# Altium PCB PCB2.PcbDoc
Units mm, origin at the board's own origin, x right, y up, seen from the top; angles counter-clockwise.
Board outline 70 x 75 mm, 2 copper layers (Top Layer, Bottom Layer); 7 components, 32 nets, 105 pads, 0 vias.
Unrouted connection lines stored in the file: 2.
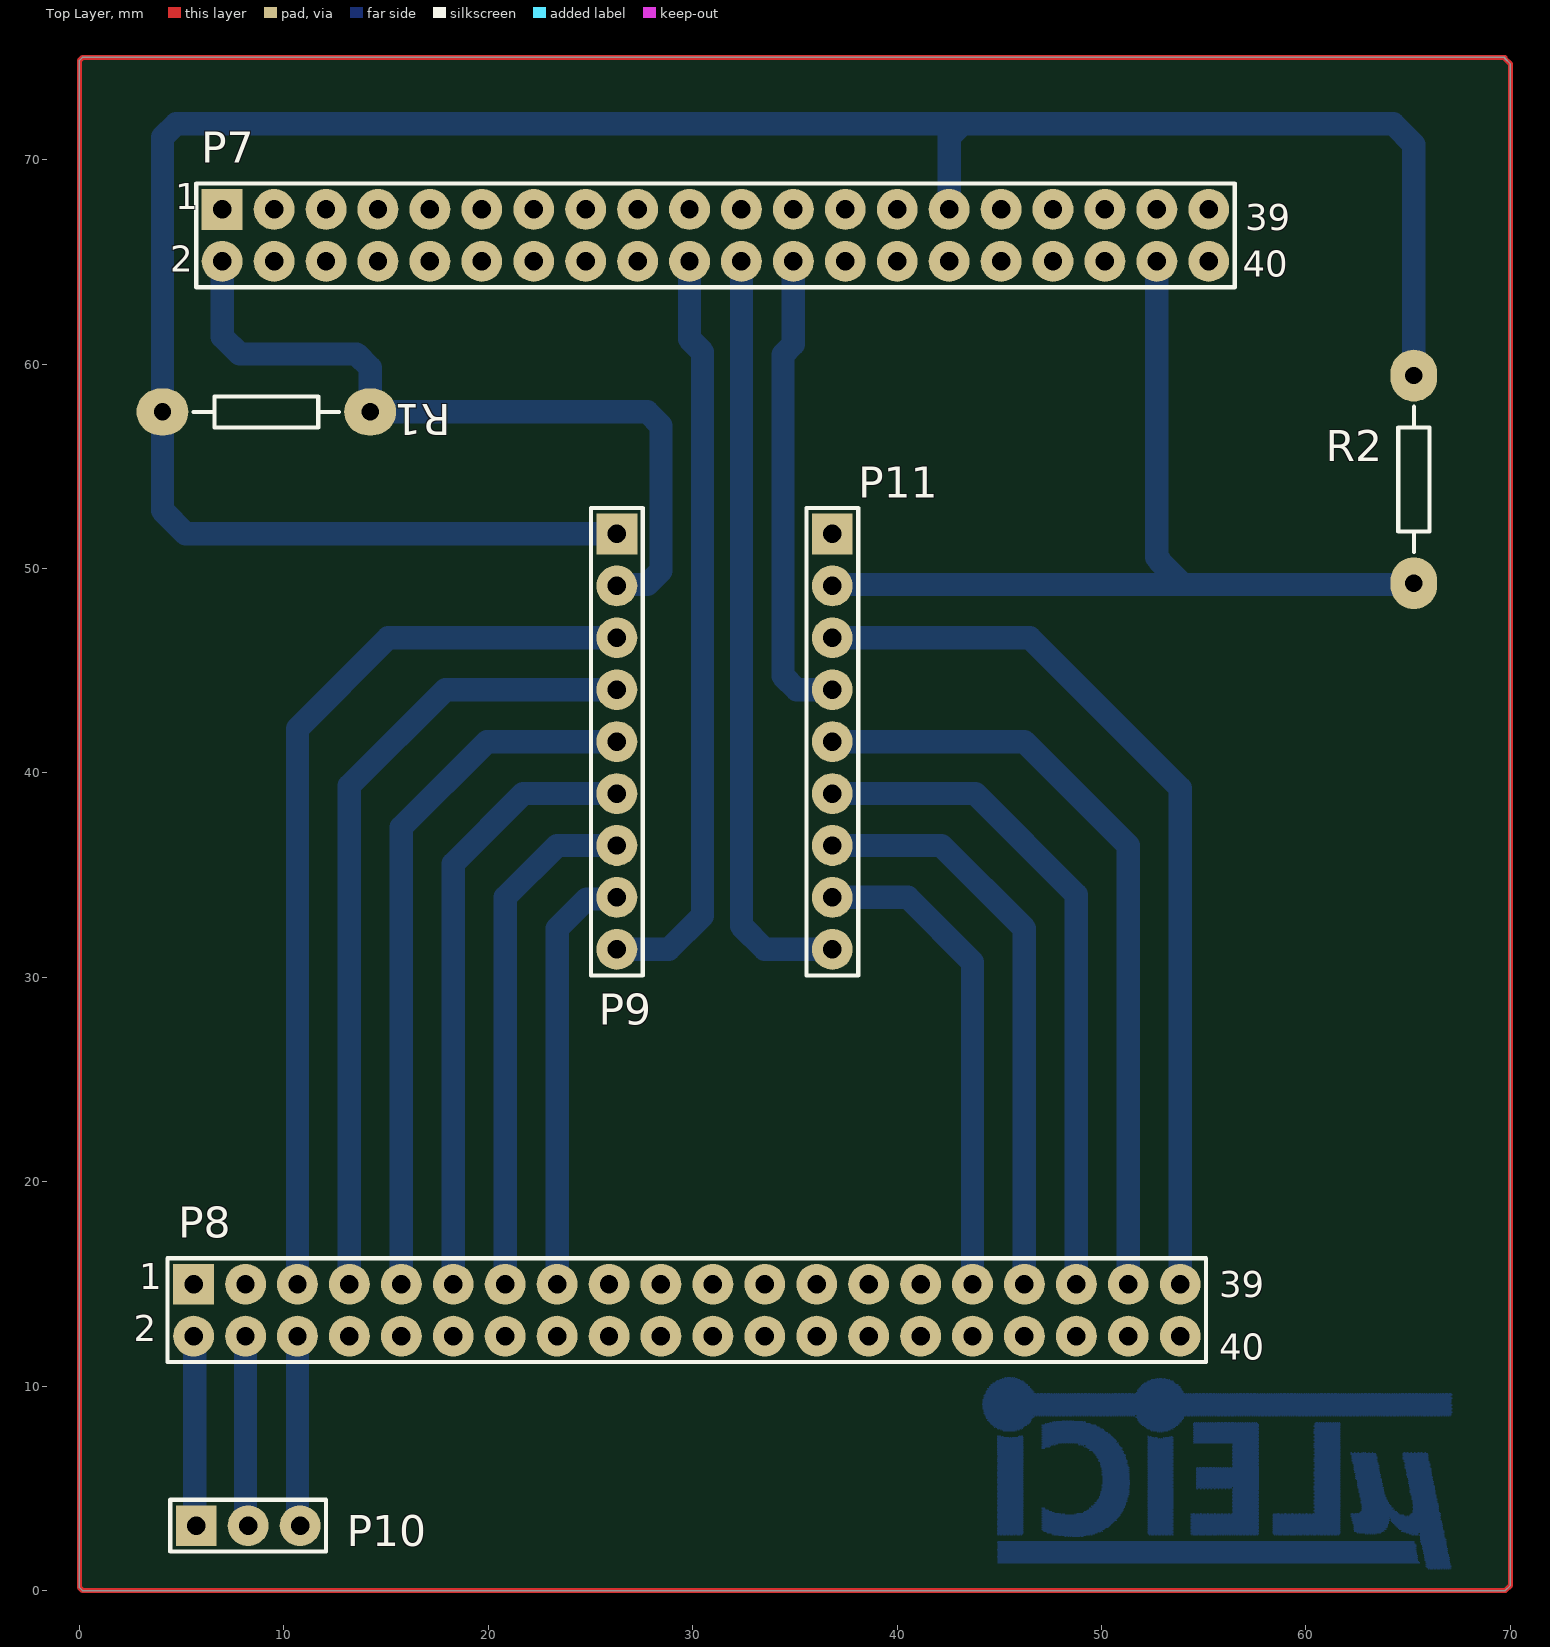
[diagram p0: Top Layer view]
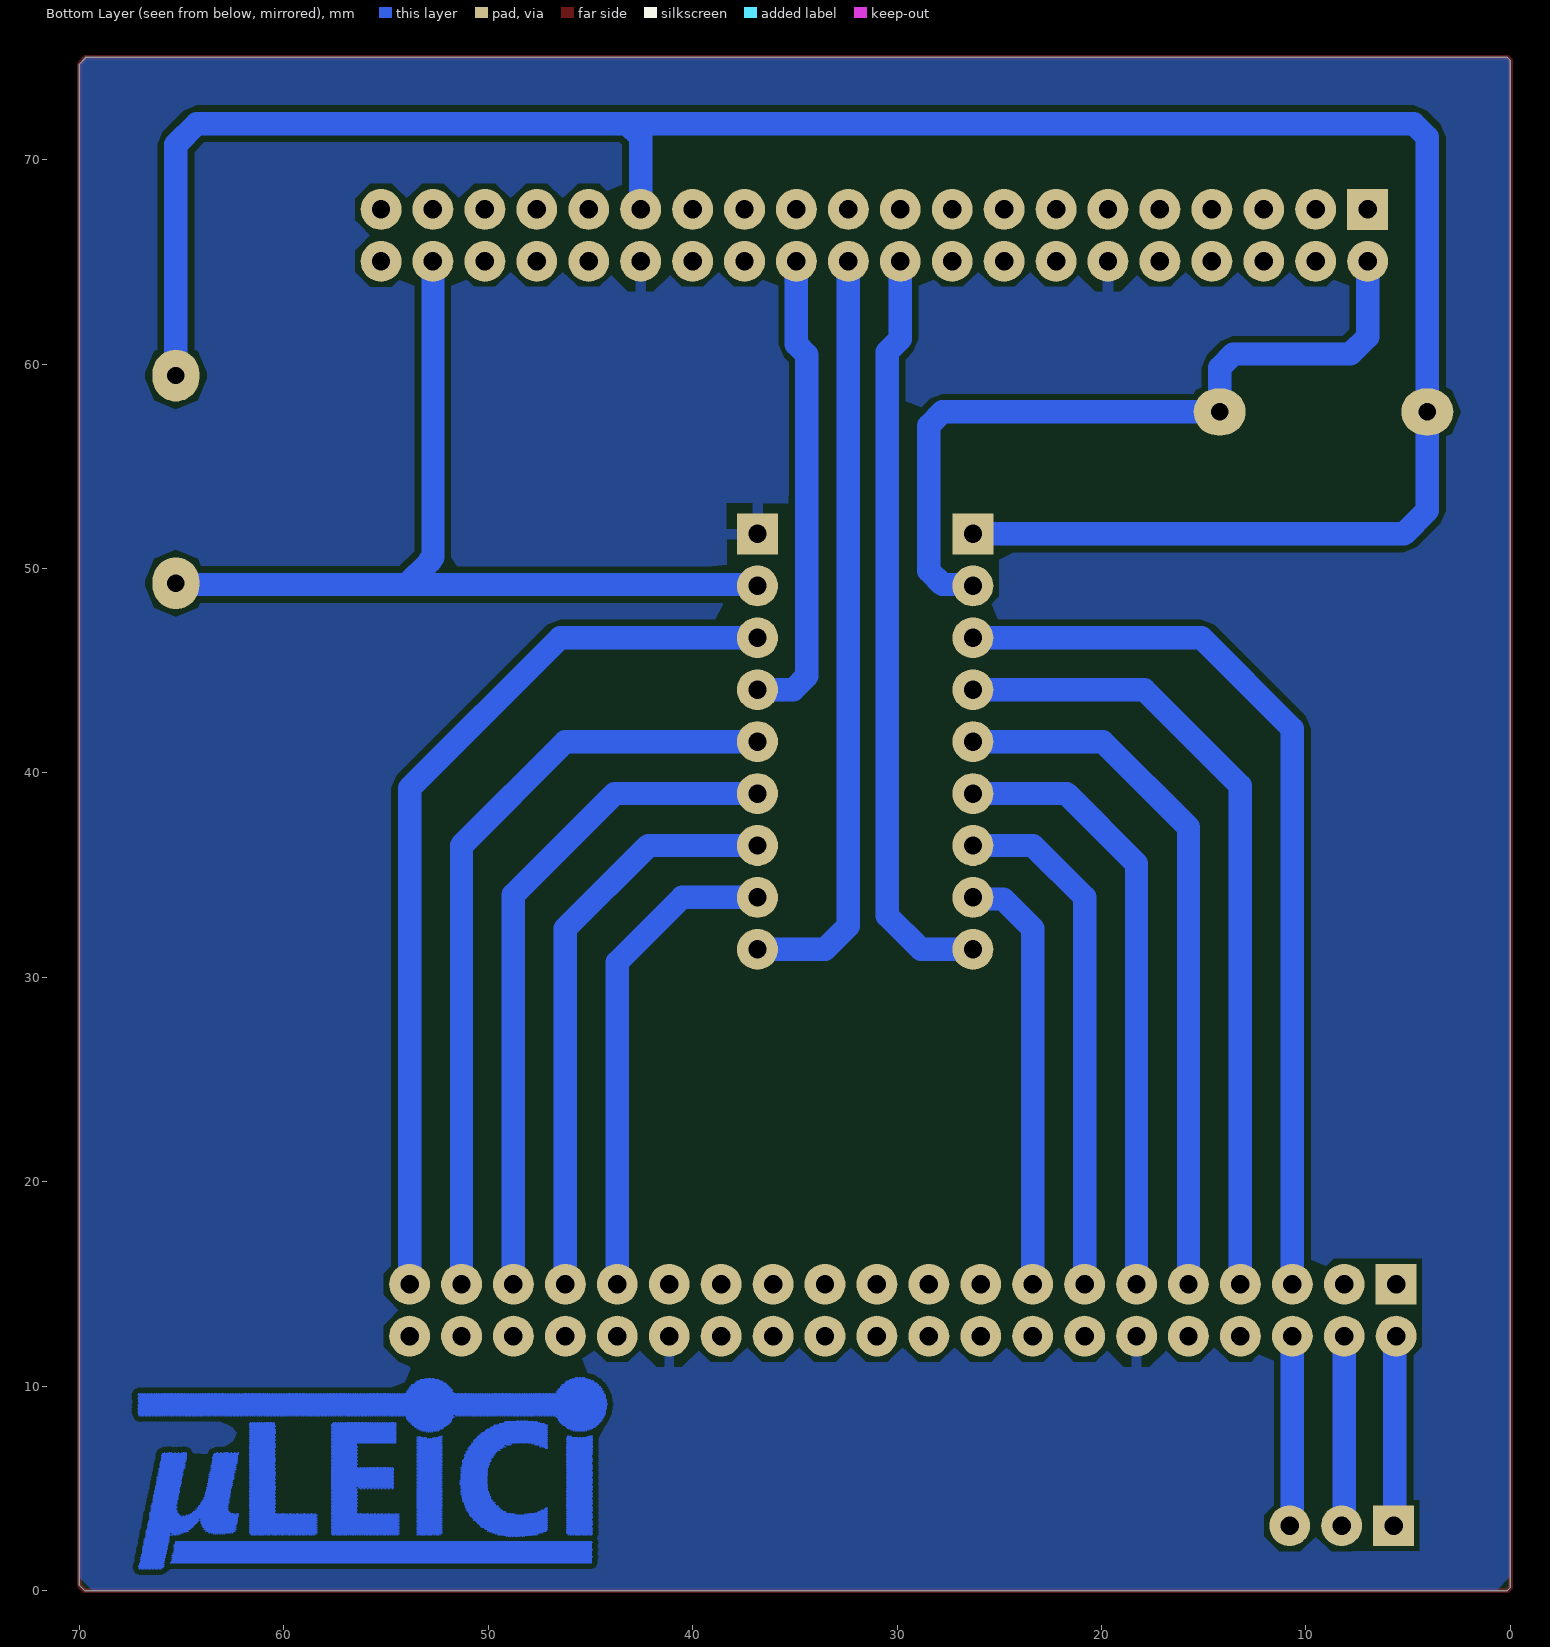
[diagram p1: Bottom Layer view, seen from below]

## Layer stack, top to bottom
Top Solder: solder mask 0.0102, Solder Resist, Dk 3.5
Top Layer: signal copper 0.0356
Dielectric 1: dielectric 0.32, FR-4, Dk 4.8
Bottom Layer: signal copper 0.0356
Bottom Solder: solder mask 0.0102, Solder Resist, Dk 3.5

## Board outline
0.149,0 0,0.149 0,74.851 0.149,75 69.723,75 69.723,74.953 70,74.676 70,0.254 69.746,0

## Design rules (kind name [scope] priority, off if disabled: settings)
Clearance [All] p1: gap=0.254 ignorepadtopadclearanceinfootprint=FALSE
PlaneClearance [All] p1: clearance=1
PlaneConnect [All] p1: planeconnectstyle=Relief reliefexpansion=0.508 reliefentries=4 reliefconductorwidth=1 reliefairgap=1
PolygonConnect [All] p1: connectstyle=Relief reliefconductorwidth=0.5 reliefentries=4 polygonreliefangle="90 Angle" airgapwidth=0.5
RoutingVias [All] p1: holewidth=0.711 width=1.27 viastyle="Through Hole" minholewidth=0.711 minwidth=1.27 maxholewidth=0.711 maxwidth=1.27
SolderMaskExpansion [All] p1: expansion=0.102 istentingtop=FALSE
Width [All] p1: maxlimit=1.27 minlimit=0.762 preferedwidth=1.143
28 further rules are at their usual default settings.

## Components (designator, comment, footprint, x,y, rotation, side; value= is the part's Value field where it differs from the comment)
P7 "GPIO0" HDR2X20 6.985,67.564 r0 top
P8 "GPIO1" HDR2X20 5.588,14.986 r0 top
P9 "Header 9" HDR1X9 26.289,51.689 r270 top
P10 "Header 3" HDR1X3 5.715,3.175 r0 top
P11 "Header 9" HDR1X9 36.83,51.689 r270 top
R1 "Resistor" "RES 0.25 W - 0.4 In" 9.144,57.658 r180 top value=10k
R2 "Resistor" "RES 0.25 W - 0.4 In" 65.278,54.356 r90 top value=10k

## Footprints (in the part's own frame and the unit in brackets; to place one, negate y for a bottom-side part, rotate by r counter-clockwise, add the part's x,y. Pads: shape width x height; smd on the part's side, far side on the other; paste and mask are expansions set on the pad)
HDR1X3 [mm] "Connector; Header; 3 Position"
  rect 2x2 hole 0.9: 1(0,0)
  round 2 hole 0.9: 2(2.54,0) 3(5.08,0)
  silkscreen extent -1.27,-1.27 6.35,1.27
HDR1X9 [mm] "Connector; Header; 9 Position"
  rect 2x2 hole 0.9: 1(0,0)
  round 2 hole 0.9: 2(2.54,0) 3(5.08,0) 4(7.62,0) 5(10.16,0) 6(12.7,0) 7(15.24,0) 8(17.78,0) 9(20.32,0)
  silkscreen extent -1.27,-1.27 21.59,1.27
HDR2X20 [mm] "Connector; Header; 20x2 Position"
  rect 2x2 hole 0.9: 1(0,0)
  round 2 hole 0.9: 2(0,-2.54) 3(2.54,0) 4(2.54,-2.54) 5(5.08,0) 6(5.08,-2.54) 7(7.62,0) 8(7.62,-2.54) 9(10.16,0) 10(10.16,-2.54) 11(12.7,0) 12(12.7,-2.54) 13(15.24,0) 14(15.24,-2.54) 15(17.78,0) 16(17.78,-2.54) 17(20.32,0) 18(20.32,-2.54) 19(22.86,0) 20(22.86,-2.54) 21(25.4,0) 22(25.4,-2.54) 23(27.94,0) 24(27.94,-2.54) 25(30.48,0) 26(30.48,-2.54) 27(33.02,0) 28(33.02,-2.54) 29(35.56,0) 30(35.56,-2.54) 31(38.1,0) 32(38.1,-2.54) 33(40.64,0) 34(40.64,-2.54) 35(43.18,0) 36(43.18,-2.54) 37(45.72,0) 38(45.72,-2.54) 39(48.26,0) 40(48.26,-2.54)
  silkscreen extent -1.27,-3.81 49.53,1.27
"RES 0.25 W - 0.4 In" [mm] "RESISTOR, 0.25 W, 0.4 IN LEAD PITCH"
  oval 2.54x2.286 hole 0.85: 1(-5.08,0) 2(5.08,0)
  silkscreen extent -3.56,-0.76 3.56,0.76, body extent -5.38,-1.17 5.38,1.14, height 2.93

## Part data
P7 P8: library part "Header 20X2", "Header, 20-Pin, Dual row", LatestRevisionDate=17-Jul-2002, LatestRevisionNote="Re-released for DXP Platform.", Publisher="Altium Limited"
P9 P11: "Header, 9-Pin", LatestRevisionDate=17-Jul-2002, LatestRevisionNote="Re-released for DXP Platform.", Publisher="Altium Limited"
P10: "Header, 3-Pin", LatestRevisionDate=17-Jul-2002, LatestRevisionNote="Re-released for DXP Platform.", Publisher="Altium Limited"

## Nets (pads, with @x,y where several pads share a name; then routed paths per layer and width w, separated by ;. In a path a pad name is that pad's centre, name@x,y a point inside that pad or via, vN(x,y) a via of type N, cw(c..) or ccw(c..) an arc to the next point about the centre after c; other vN are vias at no path point)
GND: P7.12 P7.30 P8.12 P8.30 P11.1
"NetArduino Uno_2": 
"NetArduino Uno_3": 
"NetArduino Uno_4": 
"NetArduino Uno_5V": 
"NetArduino Uno_9": 
"NetArduino Uno_10": 
"NetArduino Uno_A0": 
"NetArduino Uno_A1": 
"NetArduino Uno_A2": 
NetC1_1: 
NetP7_2: P7.2 P9.2 R1.1 | length 37.8
  Bottom Layer w1.143: P7.2 6.985,61.341 7.837,60.489 13.554,60.489 14.224,59.82 R1.1 27.778,57.658 28.448,56.988 28.448,49.882 27.778,49.212 26.352,49.212 P9.2
NetP7_20: P7.20 P9.9 | length 37.1
  Bottom Layer w1.143: P9.9 28.829,31.369 30.48,33.02 30.48,60.591 29.845,61.226 P7.20
NetP7_22: P7.22 P11.9 | length 37.4
  Bottom Layer w1.143: P7.22 32.385,32.512 33.528,31.369 P11.9
NetP7_24: P7.24 P11.4 | length 23.2
  Bottom Layer w1.143: P7.24 34.925,60.96 34.417,60.452 34.417,44.739 35.087,44.069 P11.4
NetP7_29: P7.29 P9.1 R1.2 R2.2 | length 118.6
  Bottom Layer w1.143: P9.1 5.207,51.689 4.064,52.832 R1.2 4.064,71.085 4.734,71.755 43.215,71.755 ; P7.29 42.545,71.085 43.215,71.755 ; R2.2 65.278,70.739 64.262,71.755 43.215,71.755
NetP7_38: P7.38 P11.2 R2.1 | length 44.8
  Bottom Layer w1.143: P11.2 36.893,49.212 53.975,49.212 ; P7.38 52.705,50.546 52.832,50.419 52.832,50.355 53.975,49.212 ; R2.1 65.215,49.212 53.975,49.212
NetP8_2: P8.2 P10.1 | length 9.3
  Bottom Layer w1.143: P8.2 5.651,12.383 5.651,3.238 P10.1
NetP8_4: P8.4 P10.2 | length 9.3
  Bottom Layer w1.143: P8.4 8.128,3.399 8.255,3.272 P10.2
NetP8_5: P8.5 P9.3 | length 44.6
  Bottom Layer w1.143: P8.5 10.668,42.164 15.113,46.609 P9.3
NetP8_6: P8.6 P10.3 | length 9.3
  Bottom Layer w1.143: P8.6 10.668,3.399 10.795,3.272 P10.3
NetP8_7: P8.7 P9.4 | length 39.4
  Bottom Layer w1.143: P8.7 13.208,39.37 17.907,44.069 P9.4
NetP8_9: P8.9 P9.5 | length 34.6
  Bottom Layer w1.143: P8.9 15.748,37.338 19.939,41.529 P9.5
NetP8_11: P8.11 P9.6 | length 30
  Bottom Layer w1.143: P8.11 18.288,35.56 21.717,38.989 P9.6
NetP8_13: P8.13 P9.7 | length 25.4
  Bottom Layer w1.143: P8.13 20.828,33.909 23.368,36.449 P9.7
NetP8_15: P8.15 P9.8 | length 21
  Bottom Layer w1.143: P8.15 23.368,32.385 24.814,33.831 26.211,33.831 P9.8
NetP8_29: P8.29
NetP8_31: P8.31 P11.8 | length 23.9
  Bottom Layer w1.143: P11.8 40.513,33.909 43.688,30.734 P8.31
NetP8_33: P8.33 P11.7 | length 28.5
  Bottom Layer w1.143: P11.7 42.164,36.449 46.228,32.385 P8.33
NetP8_35: P8.35 P11.6 | length 33
  Bottom Layer w1.143: P11.6 43.815,38.989 48.768,34.036 P8.35
NetP8_37: P8.37 P11.5 | length 38
  Bottom Layer w1.143: P11.5 46.228,41.529 51.308,36.449 P8.37
NetP8_39: P8.39 P11.3 | length 44.3
  Bottom Layer w1.143: P11.3 46.482,46.609 53.848,39.243 P8.39
pads on no net: P7.1 P7.3 P7.4 P7.5 P7.6 P7.7 P7.8 P7.9 P7.10 P7.11 P7.13 P7.14 P7.15 P7.16 P7.17 P7.18 P7.19 P7.21 P7.23 P7.25 P7.26 P7.27 P7.28 P7.31 P7.32 P7.33 P7.34 P7.35 P7.36 P7.37 P7.39 P7.40 P8.1 P8.3 P8.8 P8.10 P8.14 P8.16 P8.17 P8.18 P8.19 P8.20 P8.21 P8.22 P8.23 P8.24 P8.25 P8.26 P8.27 P8.28 P8.32 P8.34 P8.36 P8.38 P8.40
copper on no net: | length 289.5
  Top Layer w0.254: 0,0.149 0.149,0 69.723,0 69.746,0 70,0.254 70,74.676 69.723,74.953 69.723,75 0.149,75 0,74.851 0,0.149

## Polygon pours and split planes (outlines as drawn)
GND on Bottom Layer "GND" (solid, remove dead copper, pour order 0): 0.149,0 0,0.149 0,74.851 0.149,75 69.723,75 69.723,74.953 70,74.676 70,0.254 69.746,0

## Other copper
Bottom Layer:
  region: 2127 vertices and 1 holes, not listed, extent 44.157,7.757 67.152,10.427
  region: 701 vertices and 0 holes, not listed, extent 58.367,2.719 61.683,8.231
  region: 54.664,5.001 54.707,5.001 54.707,4.958 54.664,4.958 54.664,5.001 54.621,5.001 54.621,5.044 54.664,5.044
  region: 489 vertices and 0 holes, not listed, extent 44.889,2.719 46.181,7.585
  region: 65.301,2.374 65.301,2.331 65.301,2.288 65.344,2.288 65.344,2.245 65.387,2.245 65.387,2.202 65.344,2.202 65.344,2.159 65.387,2.159 65.387,2.116 65.344,2.116 65.344,2.073 65.387,2.073 65.387,2.03 65.344,2.03 65.344,1.987 65.387,1.987 65.387,1.944 65.387,1.901 65.387,1.858 65.43,1.858 65.43,1.815 65.43,1.771 65.43,1.728 65.473,1.728 65.473,1.685 65.43,1.685 65.43,1.642 65.473,1.642 65.473,1.599 65.43,1.599 65.43,1.556 65.473,1.556 65.473,1.513 65.473,1.47 65.473,1.427 65.516,1.427 65.516,1.384 65.559,1.384 65.559,1.341 44.932,1.341 44.932,1.384 44.932,1.427 44.932,1.47 44.932,1.513 44.932,1.556 44.932,1.599 44.932,1.642 44.889,1.642 44.889,1.685 44.932,1.685 44.932,1.728 44.932,1.771 44.932,1.815 44.932,1.858 44.932,1.901 44.932,1.944 44.932,1.987 44.889,1.987 44.889,2.03 44.932,2.03 44.932,2.073 44.932,2.116 44.932,2.159 44.932,2.202 44.932,2.245 44.932,2.288 44.932,2.331 44.889,2.331 44.889,2.374 44.932,2.374 44.932,2.417 65.301,2.417
  region: 479 vertices and 0 holes, not listed, extent 52.252,2.719 53.501,7.585
  region: 889 vertices and 1 holes, not listed, extent 54.363,2.719 57.678,8.231
  region: 952 vertices and 1 holes, not listed, extent 62.2,1.039 67.109,6.767
  region: 737 vertices and 1 holes, not listed, extent 47.085,2.633 51.391,8.317

## Text inside footprints (layer, text, board x,y; h text height)
P7: Top Overlay "39" at 57.023,66.548 h1.27; Top Overlay "40" at 56.896,64.262 h1.27; Top Overlay "2" at 4.445,64.516 h1.27; Top Overlay "1" at 4.699,67.564 h1.27
P8: Top Overlay "39" at 55.753,14.351 h1.27; Top Overlay "40" at 55.753,11.303 h1.27; Top Overlay "2" at 2.667,12.192 h1.27; Top Overlay "1" at 2.921,14.732 h1.27